# Altium PCB Boost-Shield-V1.PcbDoc
Units mil, origin at the board's own origin, x right, y up, seen from the top; angles counter-clockwise.
Board outline 1700 x 1600 mil, 2 copper layers (Top Layer, Bottom Layer); 20 components, 12 nets, 65 pads, 52 vias.
Unrouted connection lines stored in the file: 1.
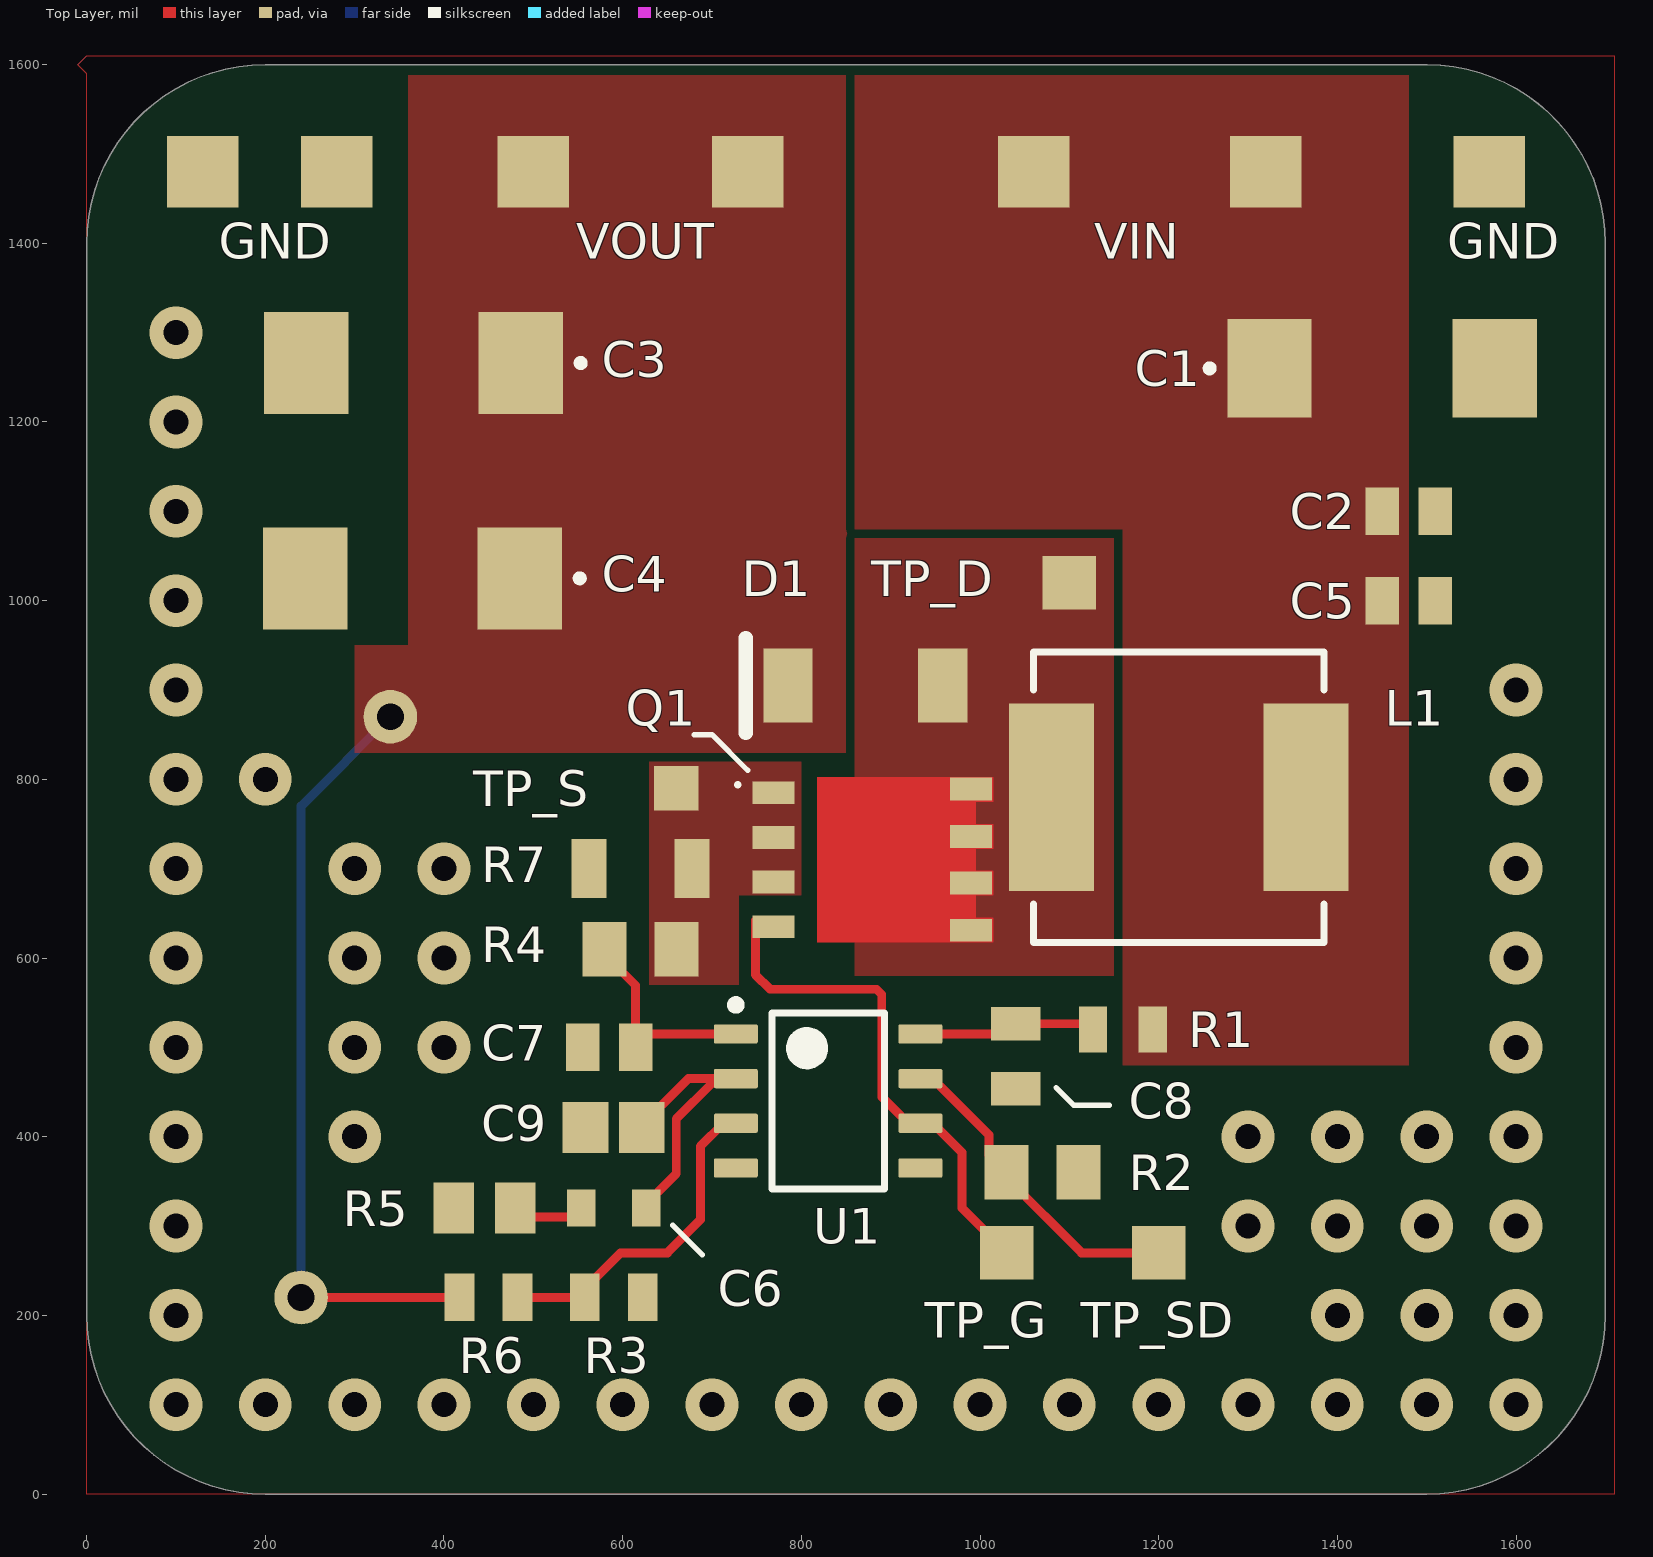
[diagram p0: Top Layer view]
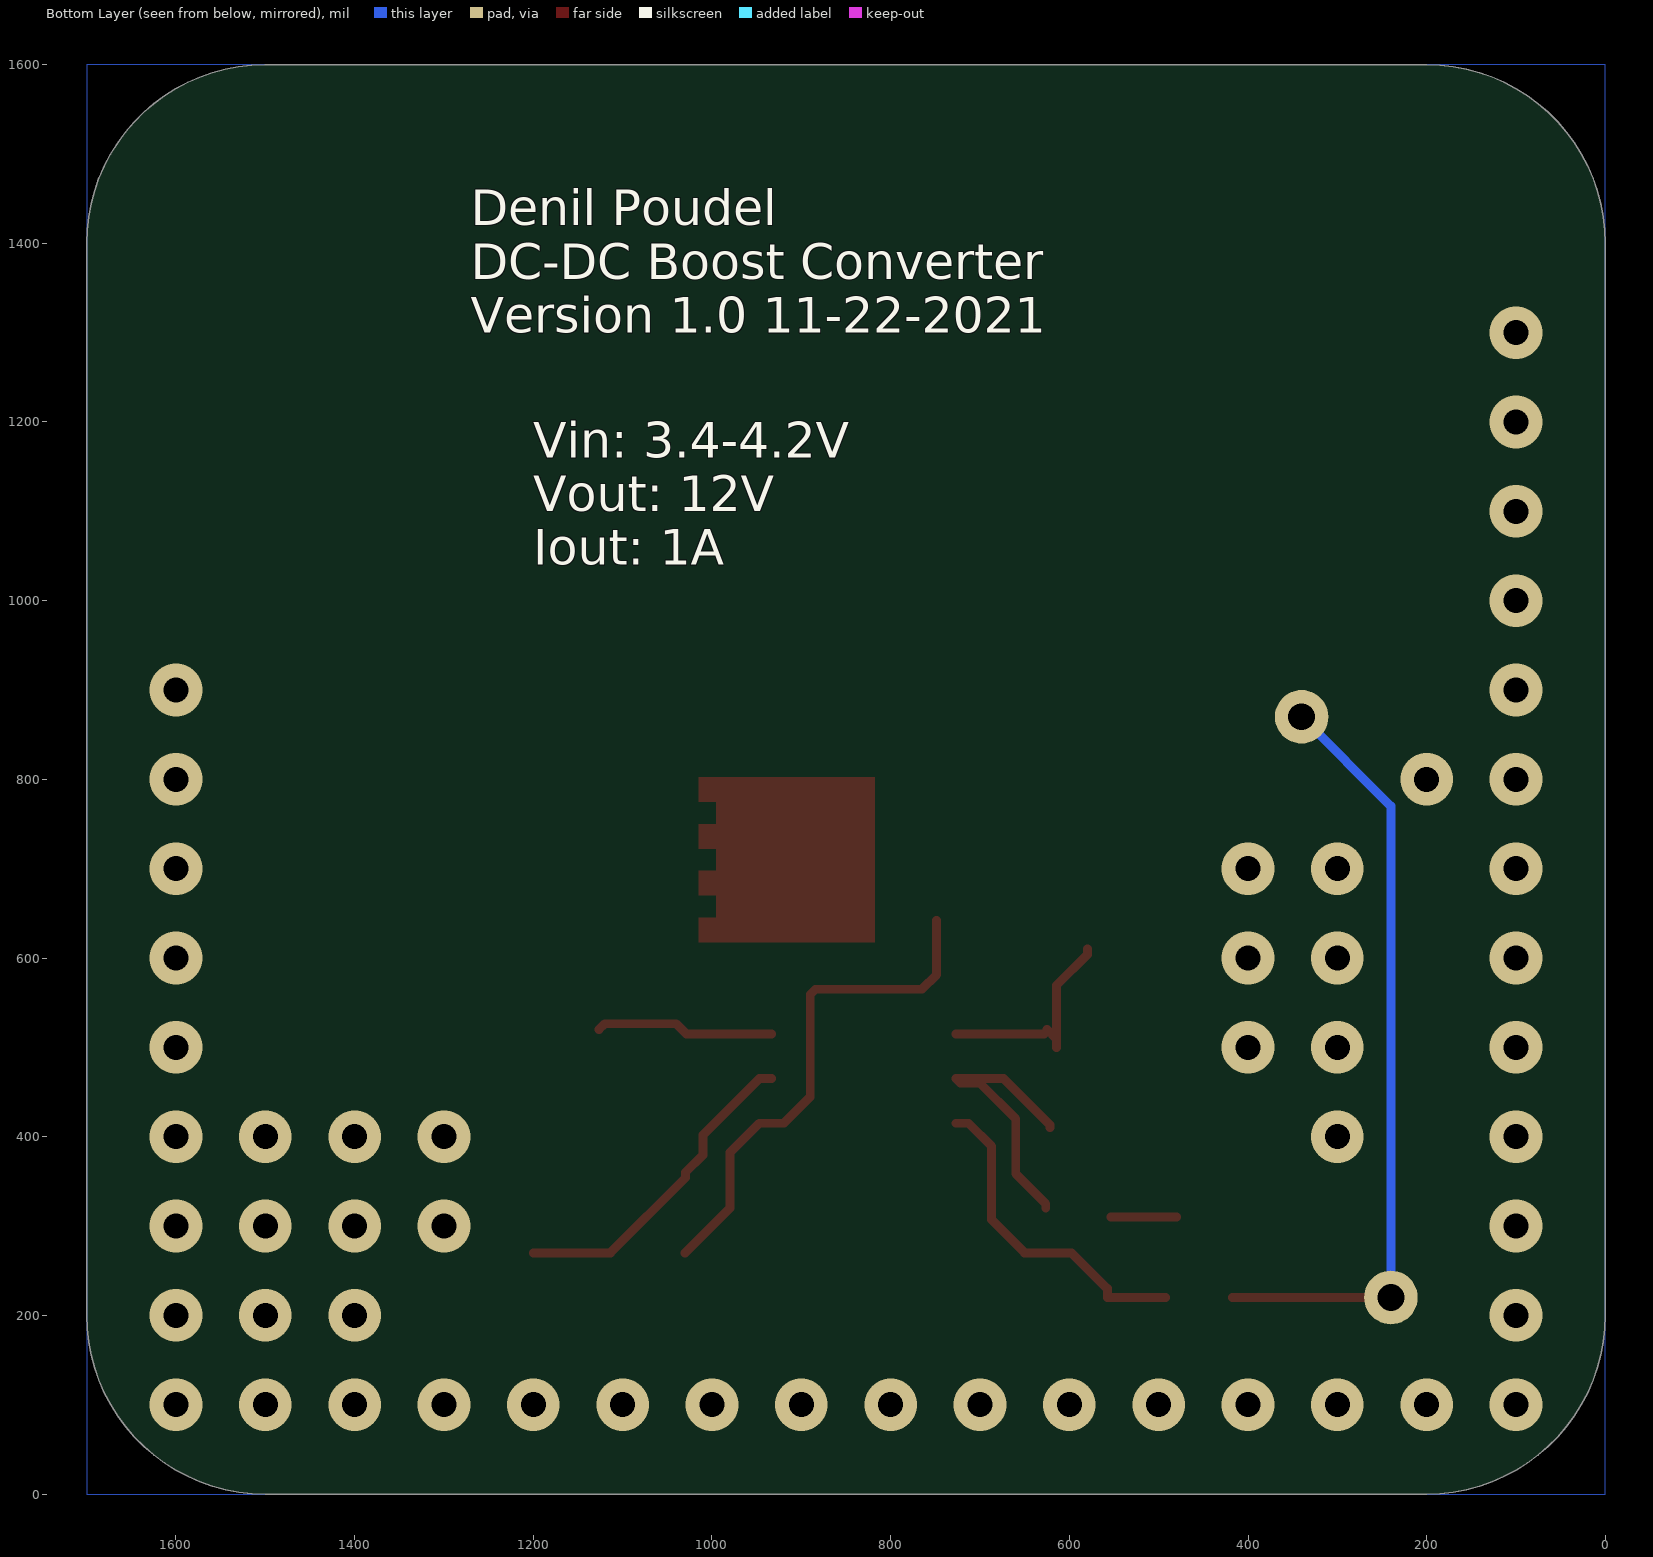
[diagram p1: Bottom Layer view, seen from below]
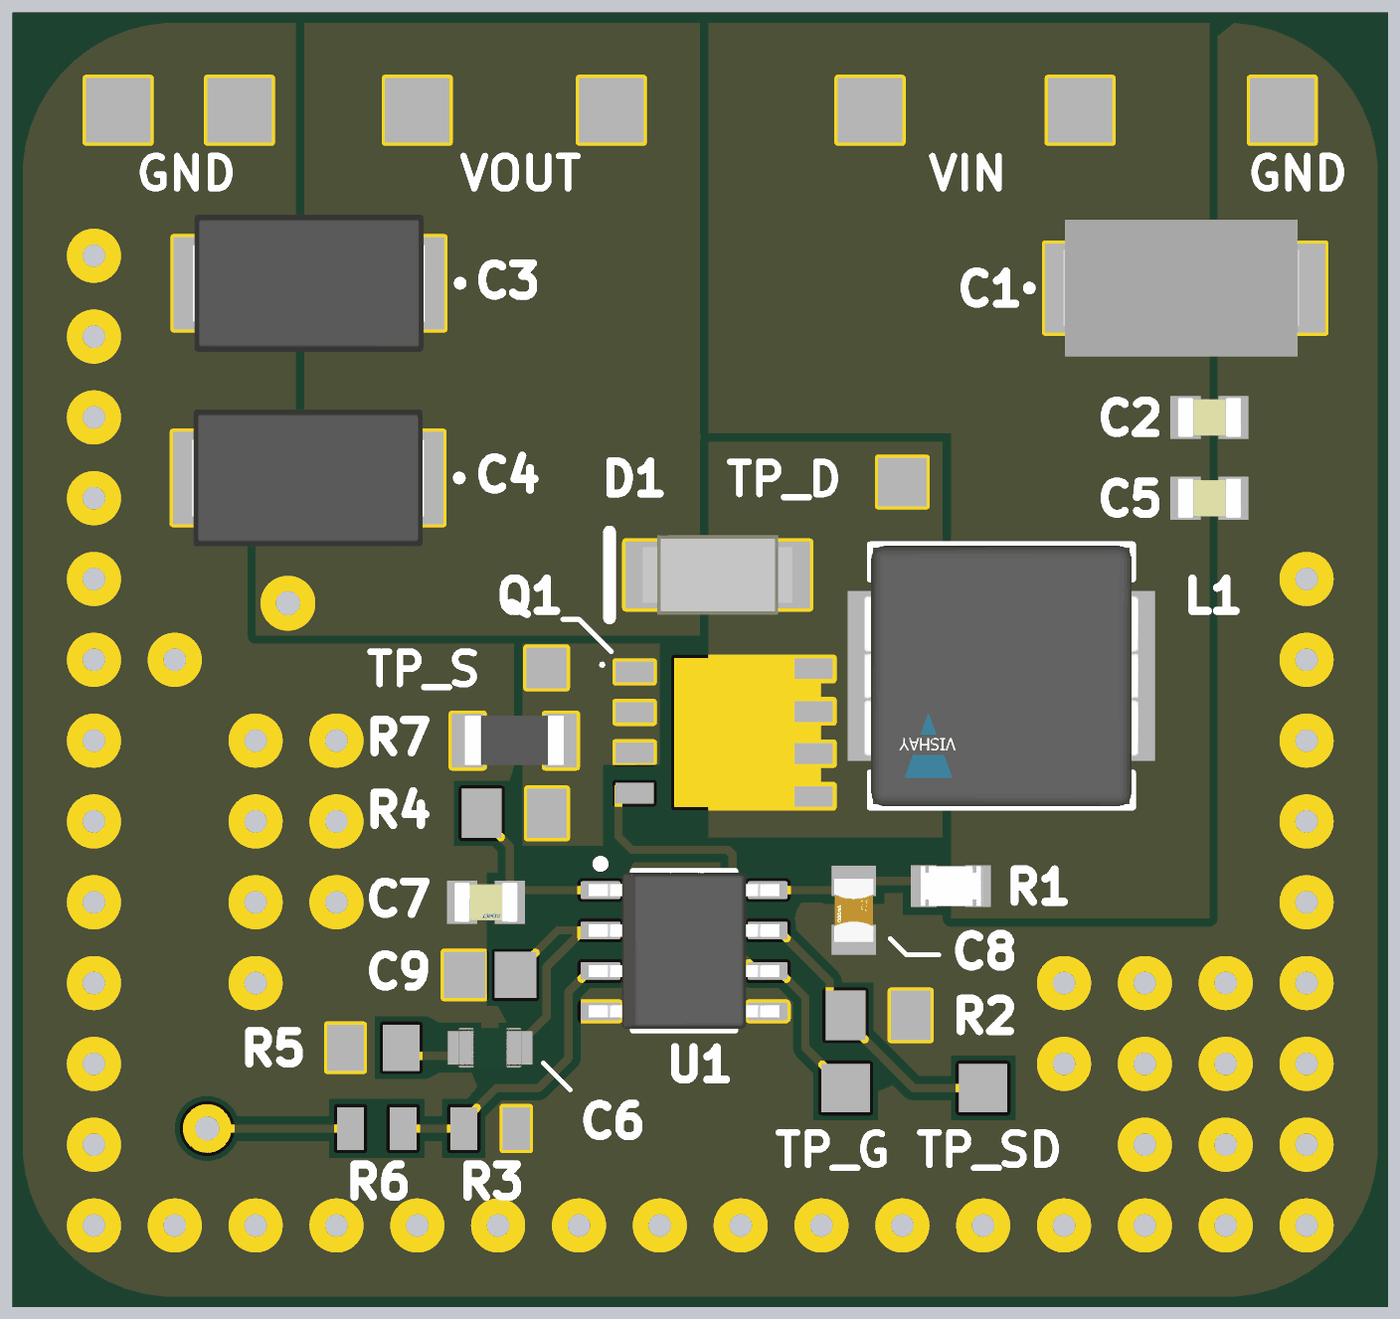
[diagram p2: 3D render of the assembled board from above, using the file's embedded part models]

## Layer stack, top to bottom
Top Solder: solder mask 0.4, Solder Resist, Dk 3.5
Top Layer: signal copper 1.4
Dielectric 1: dielectric 12.6, FR-4, Dk 4.8
Bottom Layer: signal copper 1.4
Bottom Solder: solder mask 0.4, Solder Resist, Dk 3.5

## Board outline
0,200 0,1400 cw(c200,1400) 200,1600 1500.49,1600 cw(c1500,1400) 1700,1400 1700,200 cw(c1500,200) 1500,0 200,0 cw(c200,200)

## Design rules (kind name [scope] priority, off if disabled: settings)
BoardOutlineClearance [All] p1: gap=11.81 ignorepadtopadclearanceinfootprint=FALSE
Clearance [All] p1: gap=10 ignorepadtopadclearanceinfootprint=TRUE
HoleSize [All] p1: absolutevalues=TRUE maxlimit=248.03 minlimit=11.81 maxpercent=80.000 minpercent=20.000
HoleToHoleClearance [All] p1: gap=19.68 allowstackedmicrovias=TRUE
MinimumAnnularRing [All] p1: minimumring=11.81
MinimumSolderMaskSliver [All vs HasFootprint('No Footprint')] p1: minsoldermaskwidth=8
PolygonConnect [All] p1: connectstyle=Relief reliefconductorwidth=10 reliefentries=4 polygonreliefangle="90 Angle" airgapwidth=10
RoutingVias [All] p1: holewidth=28 width=50 viastyle="Through Hole" minholewidth=11.81 minwidth=23.62 maxholewidth=28 maxwidth=50
SolderMaskExpansion [All] p1: expansion=4 istentingtop=FALSE
Width [All] p1: maxlimit=10 minlimit=7.87 preferedwidth=10
27 further rules are at their usual default settings.

## Components (designator, comment, footprint, x,y, rotation, side; value= is the part's Value field where it differs from the comment)
C1 "120µF" CAP_EEFCX0J121R 1450,1260 r0 top
C2 "10uF" FP-C0805C-DG-MFG 1480,1100 r0 top
C3 "150 µF" CAP_16TDC150MYF 366,1266 r180 top
C4 "150 µF" CAP_16TDC150MYF 364.92,1025 r180 top
C5 "10uF" FP-C0805C-DG-MFG 1480,1000 r0 top
C6 "22nF" FP-CGA4J-MFG 590,320 r180 top
C7 "10pF" FP-C0805C-DN-MFG 585,500 r180 top value="10 pF"
C8 "100nF" FP-CC0805-0_85-MFG 1040,490 r270 top value="100 nF"
C9 "1nF" CAPC2013X140X50NL20T25 590,410 r0 top
D1 "PMEG3030EP,115" NXP-SOD128_V 871.61,905 r180 top
L1 "10uH" FP-IHLP-3232DZ-FP_2_413x5-MFG 1222.5,780 r180 top
Q1 "BSC050NE2LS" INF-PG-TDSON-8-1_V 880,710 r270 top
R1 "20Ω" FP-CRCW0805-e3-IPC_C 1160,520 r180 top
R2 "27kΩ" RESC2013X50X30ML20T20 1070,360 r180 top
R3 "3.9kΩ" RESC2013X50X30LL20T20 590,220 r180 top
R4 "100Ω" RESC2013X50X30ML20T20 620,610 r0 top
R5 "4.7kΩ" RESC2013X70X40NL20T20 445.55,320 r0 top
R6 "33kΩ" RESC2013X50X30LL20T20 450,220 r180 top
R7 "11mΩ" RESC3115X65N 620,700 r0 top
U1 "LM3478MA/NOPB" D0008A_L 830,440 r0 top

## Footprints (in the part's own frame and the unit in brackets; to place one, negate y for a bottom-side part, rotate by r counter-clockwise, add the part's x,y. Pads: shape width x height; smd on the part's side, far side on the other; paste and mask are expansions set on the pad)
CAP_16TDC150MYF [mm]
  rect 2.4x2.9 smd: 1(-3.05,0) 2(3.05,0)
  silkscreen extent -4.85,-0.1 -4.65,0.1, body extent -3.65,-2.15 3.65,2.15, height 2.88
CAP_EEFCX0J121R [mm]
  rect 2.4x2.8 smd: 1(-3.2,0) 2(3.2,0)
  silkscreen extent -5,-0.1 -4.8,0.1, body extent -3.83,-2.15 3.57,2.15, height 1.9
CAPC2013X140X50NL20T25 [mm] "Chip Capacitor, 2-Leads, Body 2.00x1.25mm, IPC Medium Density"
  rect 1.3x1.45 smd: 1(-0.8,0) 2(0.8,0)
  body extent -1.1,-0.72 1.1,0.72, height 1.4
D0008A_L [mm] "SOIC, 8-Leads, Body 5x4mm, Pitch 1.27mm, IPC High Density"
  rrect18% 1.25x0.55 smd: 1(-2.625,1.905) 2(-2.625,0.635) 3(-2.625,-0.635) 4(-2.625,-1.905) 5(2.625,-1.905) 6(2.625,-0.635) 7(2.625,0.635) 8(2.625,1.905)
  silkscreen extent -2.75,-2.5 1.6,2.85, body extent -3,-2.45 3,2.45, height 1.63
FP-C0805C-DG-MFG [mm]
  rect 0.95x1.35 smd paste+0 mask+0: 1(-0.75,0) 2(0.75,0)
  body extent -1.4,-0.85 1.4,0.85, height 0.25
FP-C0805C-DN-MFG [mm]
  rect 0.95x1.35 smd paste+0 mask+0: 1(-0.75,0) 2(0.75,0)
  body extent -1.4,-0.85 1.4,0.85, height 0.25
FP-CC0805-0_85-MFG [mm]
  rect 0.95x1.4 smd paste+0 mask+0: 1(-0.925,0) 2(0.925,0)
  body extent -1.6,-1.05 1.6,1.05, height 0.25
FP-CGA4J-MFG [mm]
  rect 0.8x1.05 smd paste+0 mask+0: 1(-0.925,0) 2(0.925,0)
  body extent -1.43,-0.82 1.43,0.82, height 0.25
FP-CRCW0805-e3-IPC_C [mil]
  rect 31.75x51.5 smd paste+0 mask+0: 1(-33.5,0) 2(33.5,0)
  body extent -53,-31 53,31, height 10
FP-IHLP-3232DZ-FP_2_413x5-MFG [mil]
  rect 95x210 smd paste+0 mask+0: 1(-142.5,0) 2(142.5,0)
  silkscreen extent -163,-163 163,163, body extent -194,-166 194,166, height 10
INF-PG-TDSON-8-1_V [mm] "TDSON, 8-Leads, Body 6.15x5.15mm, Pitch 1.27mm"
  rect 0.65x1.2 smd: 1(-1.905,-2.825) 2(-0.635,-2.825) 3(0.635,-2.825) 4(1.905,-2.825) 5(2.007,2.794) 6(0.66,2.794) 7(-0.66,2.794) 8(-2.007,2.794)
  Top Layer region: -2.35,2.925 -2.35,-1.575 2.35,-1.575 2.35,2.925
  Top Layer region: -2.35,2.925 -1.65,2.925 -1.65,3.425 -2.35,3.425
  Top Layer region: 1.65,2.925 2.35,2.925 2.35,3.425 1.65,3.425
  Top Layer region: -1.015,2.925 -0.315,2.925 -0.315,3.425 -1.015,3.425
  Top Layer region: 0.315,2.925 1.015,2.925 1.015,3.425 0.315,3.425
  silkscreen extent -2.23,-3.94 -2.03,-3.74, body extent -2.58,-3.08 2.58,3.08, height 1
NXP-SOD128_V [mm] "SOD128, 2-Leads, Body 2.7x4mm"
  rect 1.4x2.1 smd: 1(-2.2,0) 2(2.2,0)
  silkscreen extent 3.4,-1.35 3.4,1.35, body extent -2.35,-1.25 2.35,1.25, height 1.1
RESC2013X50X30LL20T20 [mm] "Chip Resistor, 2-Leads, Body 2.00x1.25mm, IPC High Density"
  rect 0.85x1.35 smd: 1(-0.825,0) 2(0.825,0)
  body extent -1.1,-0.72 1.1,0.72, height 0.5
RESC2013X50X30ML20T20 [mm] "Chip Resistor, 2-Leads, Body 2.00x1.25mm, IPC Low Density"
  rect 1.25x1.55 smd: 1(-1.025,0) 2(1.025,0)
  body extent -1.1,-0.72 1.1,0.72, height 0.5
RESC2013X70X40NL20T20 [mm] "Chip Resistor, 2-Leads, Body 2.2x1.35mm, IPC Medium Density"
  rect 1.15x1.45 smd: 1(-0.875,0) 2(0.875,0)
  body extent -1.1,-0.72 1.1,0.72, height 0.7
RESC3115X65N [mm]
  rect 1x1.68 smd: 1(-1.463,0) 2(1.463,0)
  body extent -1.55,-0.76 1.55,0.79, height 0.65

## Part data
C1: library part EEFCX0J121R, "120µF 6.3V Aluminum - Polymer Capacitors 2917 (7343 Metric) 15mOhm 2000 Hrs @ 105°C  EEFCX0J121R"
C2 C5: library part CMP-2007-03243-2, "CAP CER 10UF 10V X5R 0805", 3DS Part Number=220-00001, Manufacturer=Kemet, Manufacturer Part Number=C0805C106K8PACTU, Package=C0805C-DG, Temperature="-55°C to +85°C", Temperature Characteristic=X5R, Temperature Coefficient=15%, Temperature Range High=+85°C, Temperature Range Low=-55°C, Tolerance=10%, Voltage=10V, Automotive=No, Capacitance=10uF, Category=Cap, ComponentLink2Description=Datasheet, ComponentLink2URL=https://content.kemet.com/datasheets/KEM_C1006_X5R_SMD.pdf, Device Class L1="Passive Components", Device Class L2=Capacitors, Device Class L3="Ceramic Capacitors", Digikey Description="CAP CER 10UF 10V X5R 0805", Height=1.4mm, Ipc Land Pattern Name=CAPC200125X125, Lead Free=Yes, Material=Ceramic, Mouser Description="CAP CER 10UF 10V X5R 0805", Octopart=https://octopart.com/c0805c106k8pactu-kemet-98697, RoHS=TRUE, Voltage Rating=10V
C3 C4: library part 16TDC150MYF, "150 µF Molded Tantalum Polymer Capacitor 16 V 2917 (7343 Metric) 50mOhm @ 100kHz"
C6: library part CMP-08246-000753-1, "Cap Ceramic 22nF 50V C0G 5% Pad SMD 0805 +125°C Automotive T/R CGJ4J2C0G1H223J125AA", Case Code (Imperial)=0805, Case Code (Metric)=2012, Dielectric=C0G, Max Operating Temperature=125°C, Min Operating Temperature=-55°C, Package Quantity=1, Ratings=AEC-Q200, Tolerance=5%, Voltage Rating=50V, Capacitance=22nF, Case/Package=0805, Composition=Ceramic, Depth=1.25mm, Height=1.25mm, Lead Free="Lead Free", Length=2mm, Mount="Surface Mount", Packaging="Tape and Reel", REACH SVHC="No SVHC", Termination=SMD/SMT, Thickness=0.057inch, Voltage Rating (DC)=50V, Weight=0.000194oz, Width=0.049inch
C7: library part CMP-1036-00838-4, "CAP CER 10PF 16V 20% NP0 0805", Capacitance="10 pF", Manufacturer=KEMET, Manufacturer Part Number=C0805C100M4GACTU, Package=C0805C-DN, Temperature="-55°C to +125°C", Temperature Characteristic=C0G, Temperature Coefficient=30ppm/°C, Temperature Range High=+125°C, Temperature Range Low=-55°C, Tolerance=0.2, Voltage Rating="16 V", Automotive=No, Category=Cap, ComponentLink2Description=Datasheet, ComponentLink2URL=https://content.kemet.com/datasheets/KEM_C1003_C0G_SMD.pdf, Device Class L1="Passive Components", Device Class L2=Capacitors, Device Class L3="Ceramic Capacitors", Digikey Description="CAP CER 10PF 16V 20% NP0 0805", Height=0.88mm, Ipc Land Pattern Name=CAPC200125X78, Lead Free=Yes, Material=Ceramic, Mouser Description="Multilayer Ceramic Capacitors MLCC - SMD/SMT 16volts 10pF C0G 20%", Octopart=https://octopart.com/c0805c100m4gactu-kemet-16430157, RoHS=TRUE
C8: library part CMP-1036-04402-6, "CAP CER 0.1UF 16V X7R 0805", Capacitance="100 nF", Manufacturer=Yageo, Manufacturer Part Number=CC0805KRX7R7BB104, Package=CC0805-0.85, Temperature="-30°C to +85°C", Temperature Characteristic=X7R, Temperature Range High=+85°C, Temperature Range Low=-30°C, Tolerance=0.1, Voltage Rating="16 V", Automotive=No, Category=Cap, ComponentLink2Description=Datasheet, ComponentLink2URL=http://www.yageo.com/documents/recent/UPY-GPHC_Y5V_6.3V-to-50V_8.pdf, Device Class L1="Passive Components", Device Class L2=Capacitors, Device Class L3="Ceramic Capacitors", Digikey Description="CAP CER 0.1UF 16V X7R 0805", Footprint Url=http://www.yageo.com/exep/pages/download/literatures/UPY-C_GEN_24.pdf, Height=0.95mm, Ipc Land Pattern Name=CAPC200125X85, Lead Free=Yes, Material=Ceramic, Mouser Description="Multilayer Ceramic Capacitors MLCC - SMD/SMT 100nF 16V X7R 10%", Octopart=https://octopart.com/cc0805krx7r7bb104-yageo-39467769, RoHS=TRUE
C9: library part CMP-2007-04527-1, "08051A102JAT2A", Manufacturer="AVX Interconnect / Elco", Part Number=08051A102JAT2A
D1: library part CMP-2000-06906-1, "Schottky Barrier Rectifier, 3 A, 30 V, -55 to 150 degC, 2-Pin SOD128, RoHS, Tape and Reel", Capacitance @ Vr, F=470pF@1V,1MHz, Current - Average Rectified (Io)=3A, Current - Reverse Leakage @ Vr=5mA@30V, Manufacturer="NXP Semiconductors", Operating Temperature - Junction=150°C(Max), Package / Case=SOD-128, Package Description="2-Pin Plastic Surface-Mounted Package, Body 2.5 x 3.8 mm", Package Reference=SOD128, Package Version=02/2016, Standard Package=1, Voltage - DC Reverse (Vr) (Max)=30V, Voltage - Forward (Vf) (Max) @ If=360mV@3A, Category=DiscreteSemiconductorProducts, Datasheet URL=http://www.nxp.com/documents/data_sheet/PMEG3030EP.pdf, Datasheet Version="Rev. 01, 12/2009", Diode Type=Schottky, Family=Diodes,Rectifiers-Single, Manufacturer URL=http://www.nxp.com/, Mounting Technology=SurfaceMount, Mounting Type=SurfaceMount, Online Catalog=SchottkyDiode, Other Names=568-6761-6, Package URL=http://www.nxp.com/documents/outline_drawing/SOD128.pdf, Packaging=Digi-Reel®, PCN Packaging=LighterReels02/Jan/2014, Reverse Recovery Time (trr)=-, Series=-, Speed=FastRecovery=200mA(Io), Supplier Device Package=SOD-128
L1: library part CMP-02424-000288-1, "FIXED IND 10UH 5.2A 59.9 MOHM", Case/Package=3232, Current Rating=5.2A, DC Resistance (DCR)=59.9mR, Inductance Tolerance=20%, Max Operating Temperature=125°C, Min Operating Temperature=-55°C, Package Quantity=500, Saturation Current=9A, Self Resonant Frequency=15MHz, Test Frequency=100kHz, Core Material=Metal, Depth=8.26mm, Height=4mm, Height - Seated (Max)=0.157inch, Inductance=10uH, Lead Free="Lead Free", Length=8.64mm, Max DC Current=5.2A, Military Standard=Not, Mount="Surface Mount", Number of Pins=2, Packaging="Tape and Reel", Radiation Hardening=No, RMS Current (Irms)=5.2A, Shielding=Shielded, Termination=SMD/SMT, Tolerance=20%, Width=0.322inch
Q1: library part CMP-1090-00044-1, "N-Channel OptiMOS Power-MOSFET, 25 V VDS, 58 A ID, -55 to 150 degC, PG-TDSON-8-1, Reel, Green", Manufacturer=Infineon, ComponentLink1Description="Manufacturer URL", ComponentLink1URL=http://www.infineon.com/, ComponentLink2Description=Datasheet, ComponentLink2URL=http://www.infineon.com/dgdl/BSC050NE2LS_Rev+2.1_.pdf?folderId=db3a304326dfb1300126fb3bec803f1a&fileId=db3a304326dfb1300126fb5ce0cb3f2d, ComponentLink3Description="Package Specification", ComponentLink3URL=http://www.infineon.com/cms/packages/SMD_-_Surface_Mounted_Devices/P-PG-TDSON/P-PG-TDSON-08-01x_2x_3.html?__locale=en, DatasheetVersion="Rev. 2.1", Green=TRUE, Halogen-free=TRUE, ID (max)="58Â A", IDpuls (max)="232Â A", Mounting Technology="Surface Mount", PackageDescription="8-Pin Plastic (Green) Thin Dual Small Outline Non-Leaded Package, 5.15 x 5.9 mm Body, 1.27 mm Pitch", PackageReference=PG-TDSON-8-1, Packing=Reel, PartNumber=BSC050NE2LS, Polarity=N, Ptot (max)="28Â W", QG="5Â nC", RDS (on) (max)="5Â mOhm", RDS (on) (max) (@4.5V)="7.1Â mOhm", Rth="4.5Â K/W", RthJA (max)="50Â K/W", RthJC (max)="4.5Â K/W", VDS (max)="25Â V", VGS(th) (max)="2Â V", VGS(th) (min)="1.2Â V"
R1: library part CMP-2001-03669-2, "RES Thick Film, 20Ω, 1%, 0.125W, 100ppm/°C, 0805", Case Code (Imperial)=0805, Case Code (Metric)=2012, Max Operating Temperature=155°C, Max Power Dissipation=125mW, Min Operating Temperature=-55°C, Package Quantity=10, Resistance=20R, Temperature Coefficient=100ppm/°C, Tolerance=1%, Voltage Rating=150V, Case/Package=0805, Composition="Thick Film", Contact Plating=Tin, Depth=1.25mm, Features="Automotive AEC-Q200", Height=0.02inch, Lead Free="Lead Free", Length=2mm, Military Standard=Not, Number of Terminations=2, Packaging="Tape and Reel", Power Rating=125mW, Radiation Hardening=No, Termination=Solder, Voltage Rating (DC)=150V, Weight=0.000194oz, Width=0.049inch
R2: library part CMP-2001-03741-1, "CRCW080527K0FKEA", Manufacturer="Vishay Dale", Part Number=CRCW080527K0FKEA
R3: library part CMP-1013-00576-2, "CRCW08053K90FKEA", Manufacturer="Vishay Dale", Part Number=CRCW08053K90FKEA
R4: library part CMP-2001-04903-1, "CRCW0805100RJNEA", Manufacturer="Vishay Dale", Part Number=CRCW0805100RJNEA
R5: library part CMP-2001-00550-5, "Chip Resistor, 4.7 KOhm, +/- 1%, 0.125 W, -55 to 155 degC, 0805 (2012 Metric), RoHS, Tape and Reel", Manufacturer=Panasonic, Max Operating Temperature="155 degC", Min Operating Temperature="-55 degC", Package Quantity=5000, Voltage Rating="150 V", ComponentLink1Description="Manufacturer URL", ComponentLink1URL=http://www.panasonic.com/, ComponentLink2Description=Datasheet, ComponentLink2URL=http://industrial.panasonic.com/cdbs/www-data/pdf/RDA0000/AOA0000C86.pdf, DatasheetVersion=04/2015, Height="0.6 mm", Length="2 mm", Mount="Surface Mount", Mounting Technology="Surface Mount", PackageDescription="2-Pin Surface Mount Device, Body 2 x 1.25 mm", PackageReference=0805, Packaging="Tape and Reel", Pins=2, REACH SVHC=Yes, RoHSCompliant=true
R6: library part CMP-2001-03828-1, "CRCW080533K0JNEA", Manufacturer="Vishay Dale", Part Number=CRCW080533K0JNEA
R7: library part RLP73V2BR011FTDF, "11 mOhms ±1% 0.5W, 1/2W Chip Resistor 1206 (3216 Metric) Current Sense Thick Film"
U1: library part CMP-0063-01437-3, "High Efficiency Low-Side N-Channel Controller for Switching Regulator, 8-pin Narrow SOIC, 1000 Reel", Manufacturer="Texas Instruments", PackageTopMarking=NSZXTT*L3478*MA, PowerWise=N, Code_IPC=SOIC127P600-8, Code_JEDEC=MS-012-AA, ComponentLink1Description="Datasheet URL", ComponentLink1URL=http://www.ti.com/general/docs/lit/getliterature.tsp?genericPartNumber=LM3478&fileType=pdf, CompType=MiscPower, High-Reliability=Y, PackageDescription="SOIC Narrow, 4.9 x 3.9 x 1.45mm, 8 Lead, 1.27mm Pitch", PackageReference=D0008A, PartNumber=LM3478MA/NOPB, PinCount=8, RoHS=Y

## Free pads (board coordinates)
  rect 80x80 smd: 2(1570,1480) 3(1320,1480) 4(1060,1480) 5(740,1480) 6(500,1480) 7(280,1480) 8(130,1480)
  rect 50x50 smd: 9(660,790)
  rect 60x60 smd: 9(1100,1020) 9(1200,270) 10(1030,270)
  round 60 hole 30: 12(240,220) 13(340,870)

## Via types
v1: diameter 59.06, hole 28, Top Layer to Bottom Layer, 52 vias

## Nets (pads, with @x,y where several pads share a name; then routed paths per layer and width w, separated by ;. In a path a pad name is that pad's centre, name@x,y a point inside that pad or via, vN(x,y) a via of type N, cw(c..) or ccw(c..) an arc to the next point about the centre after c; other vN are vias at no path point)
COMP: C6.1 C9.2 U1.2 | length 328.9
  Top Layer w10: C9.2 621.5,412.95 673.54,465 700,465 721.65,465 U1.2 721.65,460 700,460 660,420 660,358.5 626.42,324.92 C6.1
DRAIN: D1.1 L1.2 pad.9@1100,1020 Q1.5 Q1.6 Q1.7 Q1.8
FEEDBACK: R3.2 R6.1 U1.3 | length 368.8
  Top Layer w10: R6.1@492.48,220 R3.2 557.52,229.84 597.68,270 650,270 687.05,307.05 687.05,389.17 712.87,415 U1.3
FS: pad.9@1200,270 R2.2 U1.7 | length 364.1
  Top Layer w10: U1.7 947.13,465 1010.04,402.09 1010.04,379.61 R2.2 1029.65,354.09 1113.74,270 pad.9@1200,270
GATE: pad.10 Q1.4 U1.6 | length 574.7
  Top Layer w10: Q1.4@748.62,642.2 748.62,581.38 765,565 884.14,565 890,559.14 890,444.57 919.57,415 U1.6 947.13,415 980,382.13 980,320 pad.10
GND: C1.2 C2.2 C3.2 C4.2 C5.2 C7.2 C8.2 C9.1 pad.2 pad.7 pad.8 R2.1 R3.1 R5.1 R7.1 U1.4 U1.5
  other v1: 100,100 200,100 300,100 400,100 500,100 600,100 700,100 800,100 900,100 1000,100 1100,100 1200,100 1300,100 1400,100 1500,100 1600,100 100,200 1400,200 1500,200 1600,200 100,300 1300,300 1400,300 1500,300 1600,300 100,400 300,400 1300,400 1400,400 1500,400 1600,400 100,500 300,500 400,500 1600,500 100,600 300,600 400,600 1600,600 100,700 300,700 400,700 1600,700 100,800 200,800 1600,800 100,900 1600,900 100,1000 100,1100 100,1200 100,1300
NetC6_2: C6.2 R5.2 | length 73.6
  Top Layer w10: R5.2@480,310 C6.2@553.58,310
SENSE: C7.1 R4.1 U1.1 | length 244
  Top Layer w10: R4.1 579.65,604.09 614.53,569.21 C7.1@614.53,509.53 ; C7.1 C7.1@614.53,509.53 ; U1.1 628.23,515 625,518.23 625,520 C7.1@614.53,509.53
SOURCE: pad.9@660,790 Q1.1 Q1.2 Q1.3 R4.2 R7.2
VBAT: C1.1 C2.1 C5.1 L1.1 pad.3 pad.4 R1.1
VIN: C8.1 R1.2 U1.8 | length 200.5
  Top Layer w10: U1.8 1028.58,515 C8.1 1120.08,526.42 R1.2
VOUT: C3.1 C4.1 D1.2 pad.5 pad.6 pad.12 pad.13 R6.2 | length 868.9
  Top Layer w10: pad.12 R6.2
  Bottom Layer w10: pad.12 240,770 pad.13

## Polygon pours and split planes (outlines as drawn)
GND on Top Layer "GND" (solid, remove dead copper, shelved, pour order 6): 0,0 0,1590 -10,1600 0,1610 1710,1610 1710,0
VOUT on Top Layer "VOUT" (solid, pour order 2): 300,830 300,950 360,950 360,1590 880,1590 880,830
DRAIN on Top Layer "DRAIN" (solid, pour order 1): 860,1080 860,580 1160,580 1160,1080
SOURCE on Top Layer "SOURCE" (solid, pour order 5): 630,830 630,570 730,570 730,670 800,670 800,830
VBAT on Top Layer "VBAT" (solid, pour order 0): 1160,480 1160,1080 860,1080 860,1590 1480,1590 1480,480
GND on Bottom Layer "GND" (solid, shelved, pour order 7): 0,0 0,1600 1700,1600 1700,0

## Silkscreen, mask and mechanical layers (free items; w line width, h text height)
Top Overlay:
  lines w6: 656,301 689,268 ; 680,850 700,850 740,810 ; 1085,455 1105,435 1145,435
  text "GND" at 148,1383 h40
  text "VOUT" at 548,1383 h40
  text "VIN" at 1128,1383 h40
  text "GND" at 1523,1383 h40
  text "TP_D" at 878,1004.66 h40
  text "TP_S" at 433,769.66 h40
  text "TP_G" at 938,174.66 h40
  text "TP_SD" at 1113,174.66 h40
Bottom Overlay:
  text "Denil Poudel / DC-DC Boost Converter / Version 1.0 11-22-2021" at 1270,1300 h40
  text "Vin: 3.4-4.2V / Vout: 12V / Iout: 1A" at 1200,1040 h40
Mechanical 1:
  the board outline again, w0